# Altium PCB HCPL-3120 DIP One Leg Gate Driver Circuit.PcbDoc
Units mm, origin at the board's own origin, x right, y up, seen from the top; angles counter-clockwise.
Board outline 100 x 61 mm, 2 copper layers (Top Layer, Bottom Layer), stack 1.24 mm thick; 42 components, 22 nets, 104 pads, 0 vias.
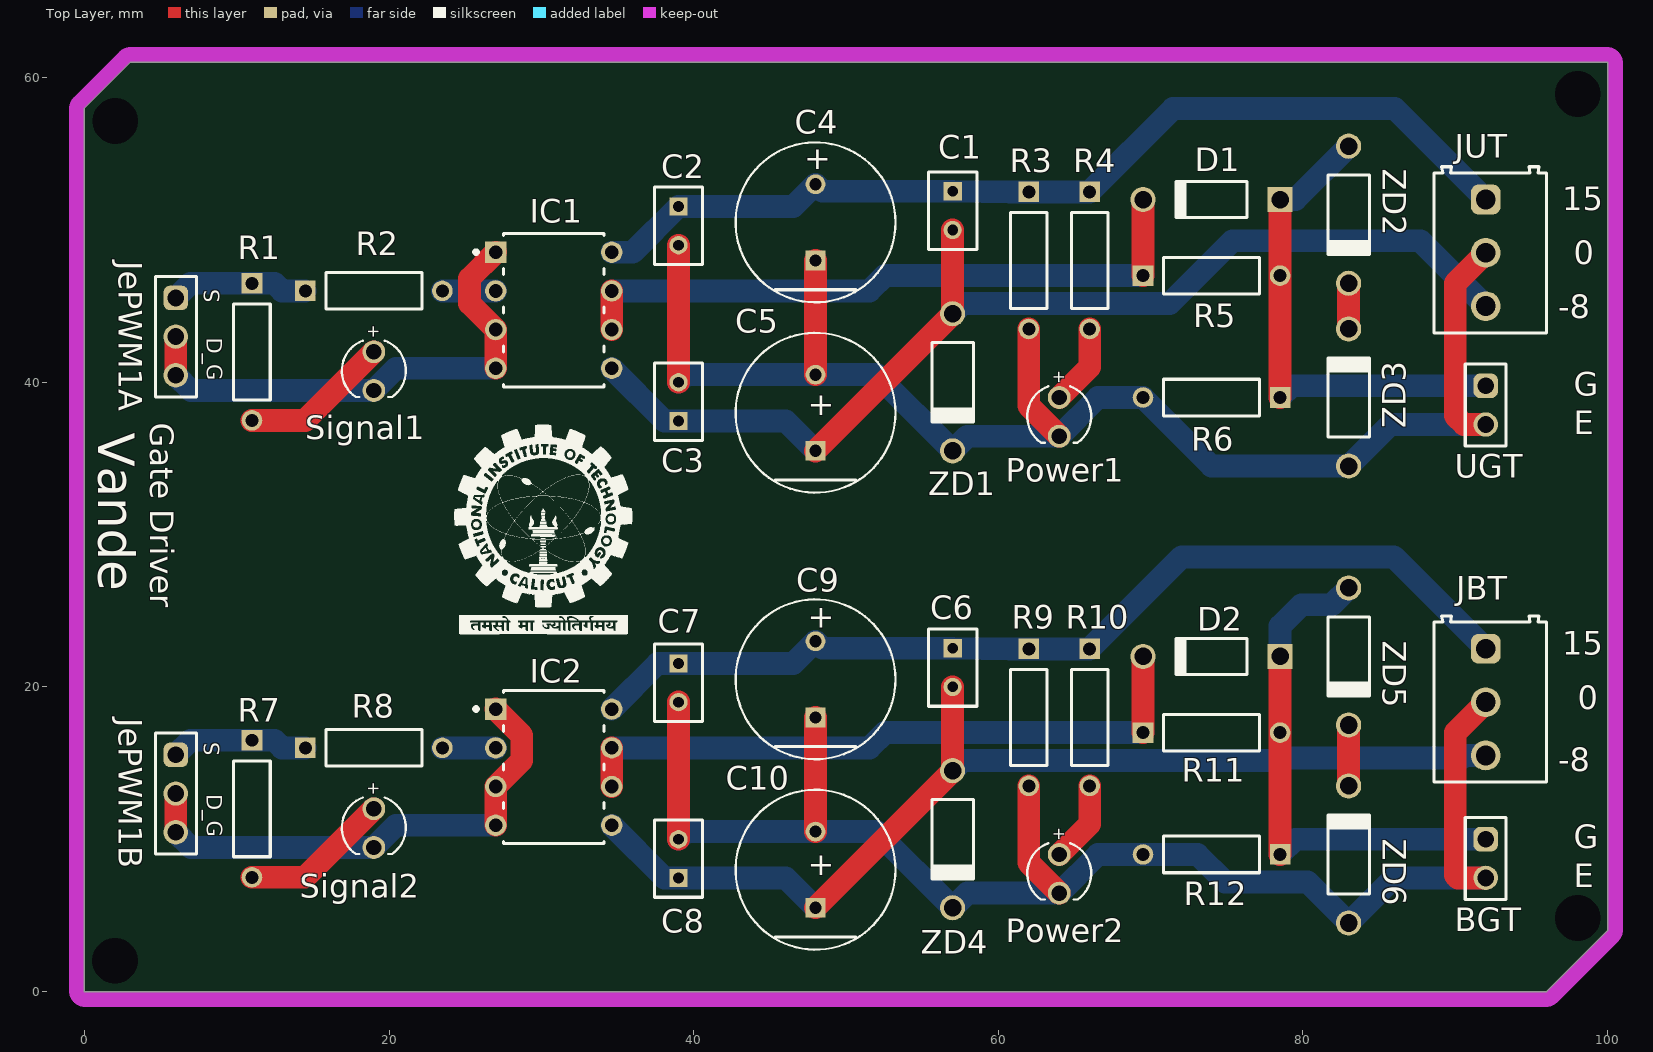
[diagram p0: Top Layer view]
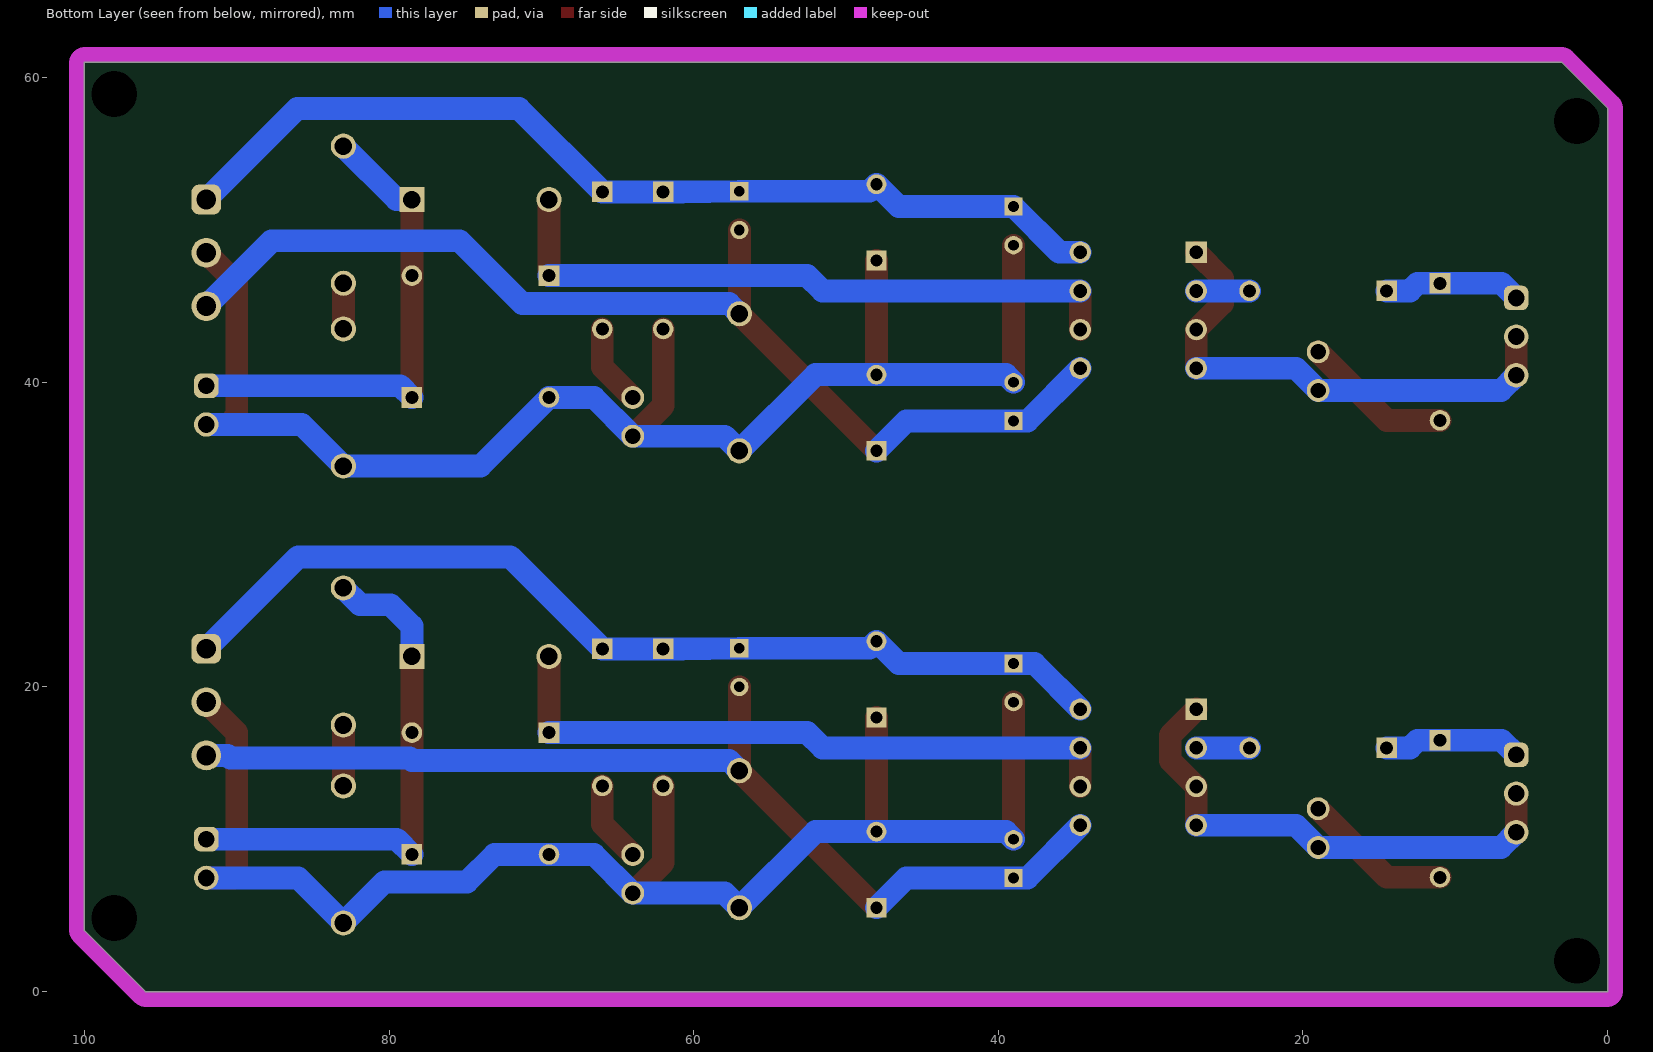
[diagram p1: Bottom Layer view, seen from below]
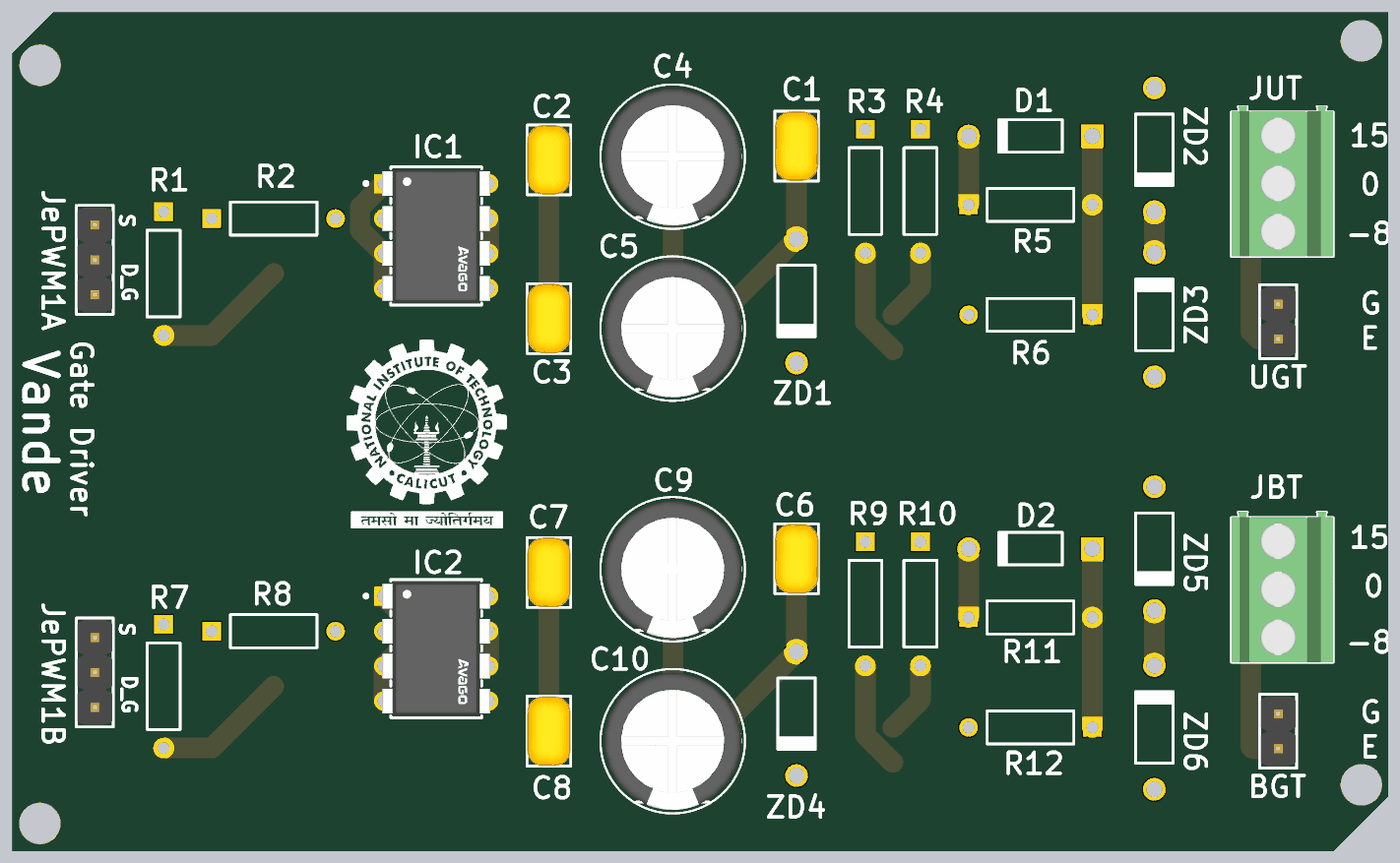
[diagram p2: 3D render of the assembled board from above, using the file's embedded part models]

## Layer stack, top to bottom
Top Solder: solder mask 0.07, SM-001, Dk 4
Top Layer: signal copper 0.12
Dielectric 1: dielectric 1, FR-4, Dk 4.8
Bottom Layer: signal copper 0.12
Bottom Solder: solder mask 0.07, SM-001, Dk 4

## Board outline
0,0 96,0 100,4 100,61 3,61 0,58

## Design rules (kind name [scope] priority, off if disabled: settings)
Clearance [All] p1: gap=0.24 ignorepadtopadclearanceinfootprint=FALSE
HoleSize [All] p1: absolutevalues=TRUE maxlimit=3.1 minlimit=0.025 maxpercent=80.000 minpercent=20.000
PolygonConnect [All] p1: connectstyle=Relief reliefconductorwidth=0.254 reliefentries=4 polygonreliefangle="90 Angle" airgapwidth=0.254
RoutingVias [All] p1: holewidth=0.5 width=0.87 viastyle="Through Hole" minholewidth=0.2 minwidth=0.65 maxholewidth=1 maxwidth=1.65
SilkToSolderMaskClearance [IsPad] p1: minsilkscreentomaskgap=0.2 clearancetoexposedcopper=TRUE
SolderMaskExpansion [All] p1: expansion=0.102 istentingtop=FALSE
Width [All] p1: maxlimit=3 minlimit=0.15 preferedwidth=1.5
28 further rules are at their usual default settings.

## Components (designator, comment, footprint, x,y, rotation, side; value= is the part's Value field where it differs from the comment)
BGT "61300211121" 61300211121 92,8.73 r270 top
C1 "SR205C104KAR" FP-SR20-MFG 57,51.27 r270 top value=100nF
C2 "SR205C104KAR" FP-SR20-MFG 39,50.27 r270 top value=100nF
C3 "SR205C104KAR" FP-SR20-MFG 39,38.73 r90 top value=100nF
C4 "EEUTA1H101" FP-RAD-TH-D_10_0_5-L_12_5-MFG 48,50.5 r90 top
C5 "EEUTA1H101" FP-RAD-TH-D_10_0_5-L_12_5-MFG 48,38 r90 top
C6 "SR205C104KAR" FP-SR20-MFG 57,21.27 r270 top value=100nF
C7 "SR205C104KAR" FP-SR20-MFG 39,20.27 r270 top value=100nF
C8 "SR205C104KAR" FP-SR20-MFG 39,8.73 r90 top value=100nF
C9 "EEUTA1H101" FP-RAD-TH-D_10_0_5-L_12_5-MFG 48,20.5 r90 top
C10 "EEUTA1H101" FP-RAD-TH-D_10_0_5-L_12_5-MFG 48,8 r90 top
D1 "1N4007-B" DIOD-DO-41-P-2_V 74,52 r180 top
D2 "1N4007-B" DIOD-DO-41-P-2_V 74,22 r180 top
IC1 "HCPL-3120" PCBComponent_1 26.111,39.523 r0 top
IC2 "HCPL-3120" PCBComponent_1 26.111,9.523 r0 top
JBT "691214110003" 691214110003 92.3,19 r270 top
JePWM1A "61300311121" 61300311121 6,43 r270 top
JePWM1B "61300311121" 61300311121 6,13 r270 top
JUT "691214110003" 691214110003 92.3,48.5 r270 top
Power1 "151031VS04000" WL-TMRC_D3.95H5.3 1334,-1232.27 r270 top
Power2 "151031VS04000" WL-TMRC_D3.95H5.3 1334,-1262.27 r270 top
R1 "MFR-25FBF52-1K" RESA60-630X240 11,42 r270 top
R2 "MFR-25FBF52-221R" RESA60-630X240 19,46 r0 top
R3 "MFR-25FBF52-1K" RESA60-630X240 62,48 r270 top
R4 "MFR-25FBF52-1K" RESA60-630X240 66,48 r270 top
R5 "MFR-25FBF52-47R5" RESA60-630X240 74,47 r0 top
R6 "MFR-25FBF5210K" RESA60-630X240 74,39 r180 top
R7 "MFR-25FBF52-1K" RESA60-630X240 11,12 r270 top
R8 "MFR-25FBF52-221R" RESA60-630X240 19,16 r0 top
R9 "MFR-25FBF52-1K" RESA60-630X240 62,18 r270 top
R10 "MFR-25FBF52-1K" RESA60-630X240 66,18 r270 top
R11 "MFR-25FBF52-47R5" RESA60-630X240 74,17 r0 top
R12 "MFR-25FBF5210K" RESA60-630X240 74,9 r180 top
Signal1 "151031SS04000" WL-TMRC_D3.95H5.3 1289,-1229.27 r270 top
Signal2 "151031SS04000" WL-TMRC_D3.95H5.3 1289,-1259.27 r270 top
UGT "61300211121" 61300211121 92,38.5 r270 top
ZD1 "1N4749A" FAIR-DO-41-2_V 57,40 r270 top
ZD2 "1N4749A" FAIR-DO-41-2_V 83,51 r270 top
ZD3 "1N4749A" FAIR-DO-41-2_V 83,39 r90 top
ZD4 "1N4749A" FAIR-DO-41-2_V 57,10 r270 top
ZD5 "1N4749A" FAIR-DO-41-2_V 83,22 r270 top
ZD6 "1N4749A" FAIR-DO-41-2_V 83,9 r90 top

## Footprints (in the part's own frame and the unit in brackets; to place one, negate y for a bottom-side part, rotate by r counter-clockwise, add the part's x,y. Pads: shape width x height; smd on the part's side, far side on the other; paste and mask are expansions set on the pad)
61300211121 [mm] "Pin Header, pitch 2.54 mm, THT, Vertical, single row, 2p"
  rrect50% 1.6x1.6 hole 1.1: 1(-1.27,0)
  round 1.6 hole 1.1: 2(1.27,0)
  silkscreen extent -2.69,-1.34 2.69,1.34, body extent -2.54,-1.27 2.54,1.27, height 8.57
61300311121 [mm] "Pin Header, pitch 2.54 mm, THT, Vertical, single row, 3p"
  rrect50% 1.6x1.6 hole 1.1: 1(-2.54,0)
  round 1.6 hole 1.1: 2(0,0) 3(2.54,0)
  silkscreen extent -3.96,-1.35 3.96,1.34, body extent -3.81,-1.27 3.81,1.27, height 8.57
691214110003 [mm] "3.50 mm Horizontal Entry Modular, 3p"
  rrect50% 1.95x1.95 hole 1.3: 1(-3.5,-0.3)
  round 1.95 hole 1.3: 2(0,-0.3) 3(3.5,-0.3)
  silkscreen extent -5.65,-3.7 5.25,3.7, body extent -5.7,-3.7 5.25,3.7, height 8.55
DIOD-DO-41-P-2_V [mm] "2-Leads, Axial Lead, Body 4.635x2.36mm, Pin Spacing 9mm"
  rect 1.65x1.65 hole 1.15: 1(-4.5,0)
  round 1.65 hole 1.15: 2(4.5,0)
  silkscreen extent -2.32,-1.18 2.32,1.18, body extent -4.93,-1.18 4.93,1.18, height 2.35
FAIR-DO-41-2_V [mm] "2-Leads, Axial leaded, Body 2.72x5.2mm, Pin Spacing 9mm"
  round 1.65 hole 1.15: 1(-4.5,0) 2(4.5,0)
  silkscreen extent -2.6,-1.36 2.6,1.36, body extent -4.93,-1.36 4.93,1.36, height 2.71
FP-RAD-TH-D_10_0_5-L_12_5-MFG [mm]
  rect 1.3x1.3 hole 0.8 paste-1000 mask+0: 1(-2.5,0)
  round 1.3 hole 0.8 paste-1000 mask+0: 2(2.5,0)
  silkscreen extent -5.25,-5.25 5.25,5.25, body extent -5.35,-5.35 5.35,5.35, height 0.25
FP-SR20-MFG [mm]
  rect 1.2x1.2 hole 0.7 paste-1000 mask+0: 1(-1.27,0)
  round 1.2 hole 0.7 paste-1000 mask+0: 2(1.27,0)
  silkscreen extent -2.54,-1.59 2.54,1.59, body extent -2.64,-1.69 2.64,1.69, height 0.25
PCBComponent_1 [mm]
  rect 1.4x1.4 hole 0.9 paste-1000 mask+0: 1(0.889,9.017)
  round 1.4 hole 0.9 paste-1000 mask+0: 2(0.889,6.477) 3(0.889,3.937) 4(0.889,1.397) 5(8.509,1.397) 6(8.509,3.937) 7(8.509,6.477) 8(8.509,9.017)
  silkscreen extent -0.53,0.18 8,10.23, body extent 0.09,0.08 9.31,10.33, height 0.25
RESA60-630X240 [mm] "Axial Resistor, 2-Leads, Dia 2.4mm, Body Length 6.3mm"
  rect 1.35x1.35 hole 0.85: 1(-4.5,0)
  round 1.35 hole 0.85: 2(4.5,0)
  silkscreen extent -3.15,-1.2 3.15,1.2, body extent -3.15,-1.2 3.15,1.2, height 2.4
WL-TMRC_D3.95H5.3 [mm] "THT Mono-color Round Color LED, 2-leads"
  round 1.5 hole 1: 1(-1271.27,-1270) 2(-1268.73,-1270)
  silkscreen extent -1272,-1272.1 -1268.31,-1267.9, body extent -1271.99,-1271.97 -1268.37,-1268.03, height 5.35

## Part data
BGT UGT: library part CMP-1712-00002-5, Color=Black, Contact Resistance=20mΩ, Current Rating=3A, Max Operating Temperature=125°C, Min Operating Temperature=-40°C, Operating Supply Voltage=250V, Connector Type="Male Pin", Contact Gender=Male, Contact Material=Copper, Contact Mating Length=5.9944mm, Contact Plating=Gold, Gender=Male, Height=8.94mm, Housing Material=PBT, Lead Free="Lead Free", Lead Pitch=2.54mm, Mount="Through Hole", NexarPartId=20081794, Number of Contacts=2, Number of Pins=2, Number of Positions=2, Number of Rows=1, Orientation=Vertical, Packaging=Bulk, Pitch=2.54mm, REACH SVHC="No SVHC", RoHS=Compliant, Termination="Through Hole", Voltage Rating=250V
C1 C2 C3 C6 C7 C8: library part CMP-04427-000013-1, "CAP CER 0.1UF 50V X7R RADIAL", Capacitance=100nF, Manufacturer=AVX, Package=SR20, Temperature="-55°C to +125°C", Temperature Characteristic=X7R, Temperature Range High=+125°C, Temperature Range Low=-55°C, Tolerance=10%, Voltage=50V, Automotive=No, Category=Cap, ComponentLink2Description=Datasheet, ComponentLink2URL=http://datasheets.avx.com/SR-Series.pdf, Device Class L1="Passive Components", Device Class L2=Capacitors, Device Class L3="Ceramic Capacitors", Digikey Description="CAP CER 0.1UF 50V X7R RADIAL", Height=5.08mm, Lead Free=Yes, Manufacturer Part Number=SR205C104KAR, Material=Ceramic, Mouser Description="Multilayer Ceramic Capacitors MLCC - Leaded 50volts 0.1uF 10% X7R", Octopart=https://octopart.com/sr205c104kar-avx-145048, RoHS=TRUE, Voltage Rating=50V
C4 C5 C9 C10: library part CMP-05427-000114-1, "Aluminum Electrolytic Capacitors (Radial Lead Type) AEC-Q200 Qualified 100uF ±20% 50V", Capacitance=100uF, Case/Package=Radial, ESR (Equivalent Series Resistance)=180mR, Max Operating Temperature=125°C, Min Operating Temperature=-40°C, Package Quantity=200, Ripple Current=555mA, Tolerance=20%, Voltage Rating=50V, Contact Plating=Tin, Diameter=10mm, Height=12.5mm, Height - Seated (Max)=0.531inch, Impedance=180mR, Lead Diameter=0.6mm, Lead Pitch=5mm, Length=12.5mm, Life (Hours)=2000Hour, Mount="Through Hole", Packaging=Bulk, Radiation Hardening=No, REACH SVHC="No SVHC", RoHS Compliant=Yes, Series=TA, Termination=Radial, Voltage Rating (DC)=50V
D1 D2: library part CMP-0639-00010-2, "30V, 1A Rectifier, 8 pF, -65 to 150 degC, 2-Pin DO-41 Plastic, RoHS, Bulk", Manufacturer="Diodes Inc", Max. Average Rectified Current IO (A)=1, Operating Temperature Range (degC)="-65 to 150", ComponentLink1Description="Manufacturer URL", ComponentLink1URL=http://diodes.com/, ComponentLink2Description=Datasheet, ComponentLink2URL=http://diodes.com/datasheets/ds28002.pdf, CT (pF)=8, DatasheetVersion="Rev. 8-2", Max. IFSM (A)=30, Max. IR (uA)=5, Mounting Technology="Through Hole", PackageDescription="2-Pin Axial Lead, Body 4.635 x 2.36 mm, Lead Spread 25.4 mm", PackageReference=DO-41-P-2, Packing=Bulk, PartNumber=1N4007-B, RoHS=TRUE, VF (V)=1, VRRM (V)=1000
IC1 IC2: library part CMP-18400-000012-1, "OPTOISO 3.75KV 1CH GATE DVR 8DIP"
JBT JUT: library part CMP-1502-02466-2, Color="Blue, Green", Current=10A, Max Operating Temperature=105°C, Min Operating Temperature=-40°C, Voltage=300V, Contact Material=Brass, Contact Plating="Brass, Tin", Current Rating=10A, Height=12.2mm, Housing Material=Nylon, Lead Pitch=3.5mm, Length=7.4mm, Mount="Through Hole", NexarPartId=18818289, Number of Contacts=3, Number of Levels=1, Number of Pins=3, Number of Positions Per Level=3, Packaging=Box, Pitch=3.5052mm, Plating="Brass, Steel", REACH SVHC=Unknown, RoHS=Compliant, Stripping Length=-6mm, Termination=Screw, Voltage Rating=300V, Width=10.9mm, Wire Gauge (Max)=24AWG, Wire Gauge (Min)=16AWG, Wire/Cable Gauge=24AWG
JePWM1A JePWM1B: library part CMP-1502-01062-2, Color=Black, Contact Resistance=20mΩ, Current Rating=3A, Max Operating Temperature=105°C, Min Operating Temperature=-40°C, Operating Supply Voltage=250V, Connector Type="Male Pin", Contact Material=Copper, Contact Mating Length=5.9944mm, Contact Plating=Gold, Gender=Male, Height=8.94mm, Lead Free="Lead Free", Lead Pitch=2.54mm, Mount="Through Hole", NexarPartId=32855521, Number of Contacts=3, Number of Pins=3, Number of Positions=3, Number of Rows=1, Orientation=Vertical, Packaging=Bulk, Pitch=2.54mm, REACH SVHC=Unknown, RoHS=Compliant, Termination=Solder, Voltage Rating=250V
Power1 Power2: library part CMP-1488-00001-2, "Led, Green, T-1 (3Mm), 570 Nm, 2.1 V, 30 Ma, 120 Mcd", Case/Package=Radial, Color=Green, Forward Current=100mA, Forward Voltage=2.1V, Max Operating Temperature=85°C, Max Reverse Voltage (DC)=5V, Min Operating Temperature=-40°C, Test Current=20mA, Dominant Wavelength=570nm, Height=5.3mm, Length=3mm, Lens Size=3mm, Lens Style="Circular, Diffused, Round", Luminous Intensity=120mcd, Mount="Through Hole", NexarPartId=29717804, Number of Pins=2, Packaging=Bulk, Peak Wavelength=573nm, REACH SVHC=Unknown, RoHS=Compliant, Viewing Angle=40°, Wavelength=570nm, Width=3mm
R1 R3 R4 R7 R9 R10: library part CMP-1659-00075-1, "Axial Resistor, 1K Ohm, +/- 1%, 0.25W, -55 to 155 degC, 2-Pin THD, RoHS, Bulk", Case\Package=Axial, Max Operating Temperature="155 degC", Min Operating Temperature="-55 degC", Package Quantity=200, Power Rating="250 mW", Resistance="10 kohm", Tolerance=1%, Voltage Rating="250 V", ComponentLink1Description="Manufacturer URL", ComponentLink1URL=http://www.yageo.com/, ComponentLink2Description=Datasheet, ComponentLink2URL=http://www.yageo.com/documents/recent/Yageo%20LR_MFR_2013.pdf, DatasheetVersion=Apr-13, Length="0.248 inch", PackageDescription="2-Pin Axial Lead, Dia 2.4 mm, Body Length 6.3 mm", PackageReference=MFR-25, Packaging=Bulk, RoHSCompliant=true
R2 R8: library part CMP-1659-00072-1, "Axial Resistor, 330 Ohm, +/- 1%, 0.25W, -55 to 155 degC, 2-Pin THD, RoHS, Bulk", Case\Package=QFN, Max Operating Temperature="85 degC", Max Supply Voltage="3.6 V", Min Operating Temperature="-40 degC", Min Supply Voltage="1.95 V", Nominal Supply Voltage="2.5 V", Package Quantity=1000, Bandwidth="800 Hz", ComponentLink1Description="Manufacturer URL", ComponentLink1URL=http://www.yageo.com/, ComponentLink2Description=Datasheet, ComponentLink2URL=http://www.yageo.com/documents/recent/Yageo%20LR_MFR_2013.pdf, DatasheetVersion=Apr-13, Height="0.95 mm", Interface=I2C, Length="3 mm", Mount="Surface Mount", PackageDescription="2-Pin Axial Lead, Dia 2.4 mm, Body Length 6.3 mm", PackageReference=MFR-25, Packaging="Tape and Reel", Pins=16, Radiation Hardening=No, REACH SVHC="No SVHC", RoHSCompliant=true, Weight="0.001122 oz"
R5 R11: library part CMP-1659-00067-1, "Axial Resistor, 30 Ohm, +/- 1%, 0.25 W, -55 to 155 degC, 2-Pin THD, RoHS, Bulk", Case\Package=SOIC, Max Operating Temperature="85 degC", Max Supply Voltage="5 V", Min Operating Temperature="-40 degC", Min Supply Voltage="3 V", Nominal Supply Current="170 uA", Nominal Voltage Gain="100 dB", Output Current="160 mA", Package Quantity=2500, Bandwidth="1 MHz", Channels=4, Common Mode Rejection Ratio="50 dB", ComponentLink1Description="Manufacturer URL", ComponentLink1URL=http://www.yageo.com/, ComponentLink2Description=Datasheet, ComponentLink2URL=http://www.yageo.com/documents/recent/Yageo%20LR_MFR_2013.pdf, DatasheetVersion=Apr-13, Height="1.58 mm", Length="8.65 mm", Mount="Surface Mount", Nominal Gain Bandwith Product="1 MHz", PackageDescription="2-Pin Axial Lead, Dia 2.4 mm, Body Length 6.3 mm", PackageReference=MFR-25, Packaging="Tape and Reel", Pins=14, Radiation Hardening=No, REACH SVHC="No SVHC", RoHSCompliant=true, Slew Rate="1 V\us", Unity Gain Bandwidth Product="1 MHz", Width="3.91 mm"
R6 R12: library part CMP-1659-00074-2, "Axial Resistor, 10K Ohm, +/- 1%, 0.25 W, -55 to 155 degC, 2-Pin THD, RoHS, Bulk", Case\/Package=Axial, Manufacturer=Yageo, Max Operating Temperature=155degC, Max Power Dissipation=250mW, Min Operating Temperature=-55degC, Package Description="2-Pin Axial Lead, Dia 2.4 mm, Body Length 6.3 mm", Package Quantity=200, Package Reference=MFR-25, Resistance=10KOhm, Temperature Coefficient=100ppm\/degreesC, Tolerance=1%, Voltage Rating=250V, Voltage Rating (DC)=200V, Composition=MetalFilm, Datasheet URL=http://www.yageo.com/documents/recent/Yageo%20LR_MFR_2013.pdf, Datasheet Version=04/2013, Lead Free=LeadFree, Length=0.248inch, Manufacturer URL=http://www.yageo.com/, Military Standard=Not, Mount=ThroughHole, Mounting Technology=ThroughHole, Number of Terminations=2, Packaging=Bulk, Power Rating=250mW, RoHSCompliant=True, Termination=Axial
Signal1 Signal2: library part CMP-1488-00005-2, "Led, Red, T-1 (3Mm), 635 Nm, 2 V, 30 Ma, 160 Mcd", Case/Package=Radial, Color=Red, Forward Current=100mA, Forward Voltage=2V, Max Operating Temperature=85°C, Max Reverse Voltage (DC)=5V, Min Operating Temperature=-40°C, Test Current=20mA, Dominant Wavelength=635nm, Height=5.3mm, Length=3mm, Lens Size=3mm, Lens Style="Circular, Diffused, Round", Luminous Intensity=160mcd, Mount="Through Hole", NexarPartId=29717802, Packaging=Bulk, Peak Wavelength=640nm, REACH SVHC=Unknown, RoHS=Compliant, Viewing Angle=40°, Wavelength=635nm, Width=3mm
ZD1 ZD4: library part CMP-0892-00026-1, "Zener Diode, 4.7V, 500mW, 5%, -65 to 200 degC, 2-Pin DO-41, Body 2.72 x 5.2 mm, RoHS", Manufacturer="Fairchild Semiconductor", Operating and Storage Temperature Range="-65 to 200 degC", Test Current IZ (mA)=10.5, Tolerance=5%, ComponentLink1Description="Manufacturer URL", ComponentLink1URL=http://www.fairchildsemi.com/, ComponentLink2Description=Datasheet, ComponentLink2URL=http://www.fairchildsemi.com/ds/1N/1N4744A.pdf, ComponentLink3Description="Package Specification", ComponentLink3URL=http://www.fairchildsemi.com/dwg/DO/DO41A.pdf, DatasheetVersion="Rev. H3", IR (uA)=5, Mounting Technology="Through Hole", PackageDescription="2-Pin Axial leaded, Body 2.72 x 5.2 mm, Lead Spread 25.4 mm", PackageReference=DO-41-2, PackageVersion="Rev. 2", PartNumber=1N4749A, PD (W)=1, RoHS=TRUE, VZ (Max.) (V)=25.2, VZ (Min.) (V)=22.8, ZZ (Max) (ohm)=25
ZD2 ZD3 ZD5 ZD6: library part CMP-0892-00026-1, "Zener Diode, 15V, 500mW, 5%, -65 to 200 degC, 2-Pin DO-41, Body 2.72 x 5.2 mm, RoHS", Manufacturer="Fairchild Semiconductor", Operating and Storage Temperature Range="-65 to 200 degC", Test Current IZ (mA)=10.5, Tolerance=5%, ComponentLink1Description="Manufacturer URL", ComponentLink1URL=http://www.fairchildsemi.com/, ComponentLink2Description=Datasheet, ComponentLink2URL=http://www.fairchildsemi.com/ds/1N/1N4744A.pdf, ComponentLink3Description="Package Specification", ComponentLink3URL=http://www.fairchildsemi.com/dwg/DO/DO41A.pdf, DatasheetVersion="Rev. H3", IR (uA)=5, Mounting Technology="Through Hole", PackageDescription="2-Pin Axial leaded, Body 2.72 x 5.2 mm, Lead Spread 25.4 mm", PackageReference=DO-41-2, PackageVersion="Rev. 2", PartNumber=1N4749A, PD (W)=1, RoHS=TRUE, VZ (Max.) (V)=25.2, VZ (Min.) (V)=22.8, ZZ (Max) (ohm)=25

## Free pads (board coordinates)
  round 1.524 hole 3: 8(2.01,2.019) 9(2.032,57.15) 10(98.044,58.928) 11(98.044,4.826)

## Nets (pads, with @x,y where several pads share a name; then routed paths per layer and width w, separated by ;. In a path a pad name is that pad's centre, name@x,y a point inside that pad or via, vN(x,y) a via of type N, cw(c..) or ccw(c..) an arc to the next point about the centre after c; other vN are vias at no path point)
D_C: BGT.2 C7.2 C8.2 C9.1 C10.2 JBT.2 Power2.2 R9.2 R12.2 ZD4.2 ZD6.1 | length 98.5
  Top Layer w1.5: C8.2 C7.2 ; C10.2 C9.1 ; R9.2 62,8.46 Power2.2 ; BGT.2 90.178,7.46 90,7.638 90,17 JBT.2
  Bottom Layer w1.5: C8.2 39.5,10.5 C10.2 52,10.5 ZD4.2 57.96,6.46 Power2.2 66.54,9 R12.2 73.083,9 74.881,7.202 80.298,7.202 ZD6.1 85.96,7.46 BGT.2
DSP_GND1: IC1.1 IC1.3 IC1.4 JePWM1A.2 JePWM1A.3 Signal1.2 | length 33.6
  Top Layer w1.5: JePWM1A.3 JePWM1A.2 ; IC1.4 IC1.3 25.281,45.179 25.281,46.821 IC1.1
  Bottom Layer w1.5: JePWM1A.3 7,39.46 Signal1.2 20.46,40.92 IC1.4
DSP_GND2: IC2.1 IC2.3 IC2.4 JePWM1B.2 JePWM1B.3 Signal2.2 | length 33.6
  Top Layer w1.5: JePWM1B.3 JePWM1B.2 ; IC2.4 IC2.3 28.71,15.17 28.71,16.83 IC2.1
  Bottom Layer w1.5: JePWM1B.3 7,9.46 Signal2.2 20.46,10.92 IC2.4
NetBGT_1: BGT.1 D2.1 R11.2 R12.1 ZD5.1 | length 34.4
  Top Layer w1.5: R12.1 R11.2 D2.1
  Bottom Layer w1.5: R12.1 79.5,10 BGT.1 ; D2.1 78.5,23.992 79.905,25.397 81.897,25.397 ZD5.1
NetD1_1: D1.1 R5.2 R6.1 UGT.1 ZD2.1 | length 32.8
  Top Layer w1.5: R6.1 R5.2 D1.1
  Bottom Layer w1.5: R6.1 79.27,39.77 UGT.1 ; D1.1 79.5,52 ZD2.1
NetD1_2: D1.2 IC1.6 IC1.7 R5.1 | length 42.8
  Top Layer w1.5: IC1.6 IC1.7 ; R5.1 D1.2
  Bottom Layer w1.5: IC1.7 51.544,46 52.544,47 R5.1
NetD2_2: D2.2 IC2.6 IC2.7 R11.1 | length 42.8
  Top Layer w1.5: IC2.6 IC2.7 ; R11.1 D2.2
  Bottom Layer w1.5: IC2.7 51.544,16 52.544,17 R11.1
NetIC1_2: IC1.2 R2.2 | length 3.5
  Bottom Layer w1.5: R2.2 IC1.2
NetIC2_2: IC2.2 R8.2 | length 3.5
  Bottom Layer w1.5: R8.2 IC2.2
NetJePWM1A_1: JePWM1A.1 R1.1 R2.1 | length 9.1
  Bottom Layer w1.5: JePWM1A.1 6.96,46.5 R1.1 12.479,46.5 12.979,46 R2.1
NetJePWM1B_1: JePWM1B.1 R7.1 R8.1 | length 9.1
  Bottom Layer w1.5: JePWM1B.1 6.96,16.5 R7.1 12.479,16.5 12.979,16 R8.1
NetPower1_1: Power1.1 R4.2 | length 5.3
  Top Layer w1.5: Power1.1 66,41 R4.2
NetPower2_1: Power2.1 R10.2 | length 5.3
  Top Layer w1.5: Power2.1 66,11 R10.2
NetR1_2: R1.2 Signal1.1 | length 9.9
  Top Layer w1.5: R1.2 14.5,37.5 Signal1.1
NetR7_2: R7.2 Signal2.1 | length 9.9
  Top Layer w1.5: R7.2 14.5,7.5 Signal2.1
NetZD2_2: ZD2.2 ZD3.2 | length 3
  Top Layer w1.5: ZD3.2 ZD2.2
NetZD5_2: ZD5.2 ZD6.2 | length 4
  Top Layer w1.5: ZD6.2 ZD5.2
U_G: C2.2 C3.2 C4.1 C5.2 JUT.2 Power1.2 R3.2 R6.2 UGT.2 ZD1.2 ZD3.1 | length 97.9
  Top Layer w1.5: C3.2 C2.2 ; C5.2 C4.1 ; R3.2 62,38.46 Power1.2 ; UGT.2 90.579,37.23 90,37.809 90,46.5 JUT.2
  Bottom Layer w1.5: C3.2 39.5,40.5 C5.2 52,40.5 ZD1.2 57.96,36.46 Power1.2 66.54,39 R6.2 74,34.5 ZD3.1 85.73,37.23 UGT.2
VCC_B: C6.1 C7.1 C9.2 IC2.8 JBT.1 R9.1 R10.1 | length 64.4
  Bottom Layer w1.5: IC2.8 37.62,21.54 C7.1 46.54,21.54 C9.2 48.46,22.54 C6.1 60.75,22.5 R9.1 R10.1 72.038,28.538 85.962,28.538 JBT.1
VCC_U_T: C1.1 C2.1 C4.2 IC1.8 JUT.1 R3.1 R4.1 | length 64.2
  Bottom Layer w1.5: IC1.8 36,48.54 C2.1 46.54,51.54 C4.2 48.46,52.54 C1.1 60.75,52.5 R3.1 R4.1 71.477,57.977 86.023,57.977 JUT.1
VEE_B: C6.2 C8.1 C10.1 IC2.5 JBT.3 ZD4.1 | length 69.3
  Top Layer w1.5: C10.1 ZD4.1 C6.2
  Bottom Layer w1.5: IC2.5 38.08,7.46 C8.1 46.04,7.46 C10.1 ; ZD4.1 57.678,15.178 78.494,15.178 78.646,15.33 90.423,15.33 90.592,15.5 JBT.3
VEE_U_T: C1.2 C3.1 C5.1 IC1.5 JUT.3 ZD1.1 | length 72.6
  Top Layer w1.5: C5.1 ZD1.1 C1.2
  Bottom Layer w1.5: IC1.5 38.08,37.46 C3.1 46.04,37.46 C5.1 ; ZD1.1 57.675,45.175 71.255,45.175 75.369,49.29 87.71,49.29 JUT.3

## Keep-outs
Keep-Out Layer:
  lines w1: -0.5,0 ccw(c0,0) 0,-0.5 ; -0.5,0 ccw(c0,0) 0,-0.5 ; -0.5,0 -0.5,58 ; -0.5,58 cw(c0,58) -0.353,58.354 ; -0.5,58 cw(c0,58) -0.354,58.354 ; -0.353,58.354 2.646,61.353 ; -0.354,58.354 -0.353,58.354 ; 0,-0.5 96,-0.5 ; 2.646,61.354 cw(c3,61) 3,61.5 ; 2.646,61.353 cw(c3,61) 3,61.5 ; 2.646,61.353 2.646,61.354 ; 3,61.5 100,61.5 ; 96,-0.5 ccw(c96,0) 96.354,-0.354 96.354,-0.353 ; 96,-0.5 ccw(c96,0) 96.354,-0.353 ; 96.354,-0.353 100.353,3.646 ; 100,61.5 cw(c100,61) 100.5,61 ; 100,61.5 cw(c100,61) 100.5,61 ; 100.353,3.646 ccw(c100,4) 100.5,4 ; 100.353,3.646 100.354,3.646 ccw(c100,4) 100.5,4 ; 100.5,4 100.5,61

## Silkscreen, mask and mechanical layers (free items; w line width, h text height)
Top Overlay:
  drawing of 26 lines, arcs and shapes, not listed
  text "+" at 47.254,54 h1.52
  text "15" at 97.028,51.308 h1.52
  text "0" at 97.79,47.752 h1.52
  text "S" at 8.89,45.212 h1 r90
  text "-8" at 96.774,44.196 h1.52
  text "D_G" at 8.041,42.926 h1 r270
  text "G" at 97.79,39.116 h1.52
  text "+" at 47.498,37.846 h1.52
  text "Gate Driver" at 4.324,37.332 h1.52 r270
  text "Vande" at 0.908,36.684 h2.4 r270
  text "E" at 97.79,36.576 h1.52
  text "+" at 47.498,23.876 h1.52
  text "15" at 97.028,22.098 h1.52
  text "0" at 98.044,18.542 h1.52
  text "S" at 8.89,15.494 h1 r90
  text "-8" at 96.774,14.478 h1.52
  text "D_G" at 8.041,12.954 h1 r270
  text "G" at 97.79,9.398 h1.52
  text "+" at 47.498,7.62 h1.52
  text "E" at 97.79,6.858 h1.52

## Text inside footprints (layer, text, board x,y; h text height)
Power1: Top Overlay "+" at 63.65,40.78 h0.8 r270
Power2: Top Overlay "+" at 63.65,10.78 h0.8 r270
Signal1: Top Overlay "+" at 18.65,43.78 h0.8 r270
Signal2: Top Overlay "+" at 18.65,13.78 h0.8 r270